# Altium PCB PCB1.PcbDoc
Units mil, origin at the board's own origin, x right, y up, seen from the top; angles counter-clockwise.
Board outline 2540 x 840 mil, 4 copper layers (Top Layer, Int1 (GND), Int2 (PWR), Bottom Layer), stack 61.811 mil thick; 28 components, 59 nets, 186 pads, 32 vias.
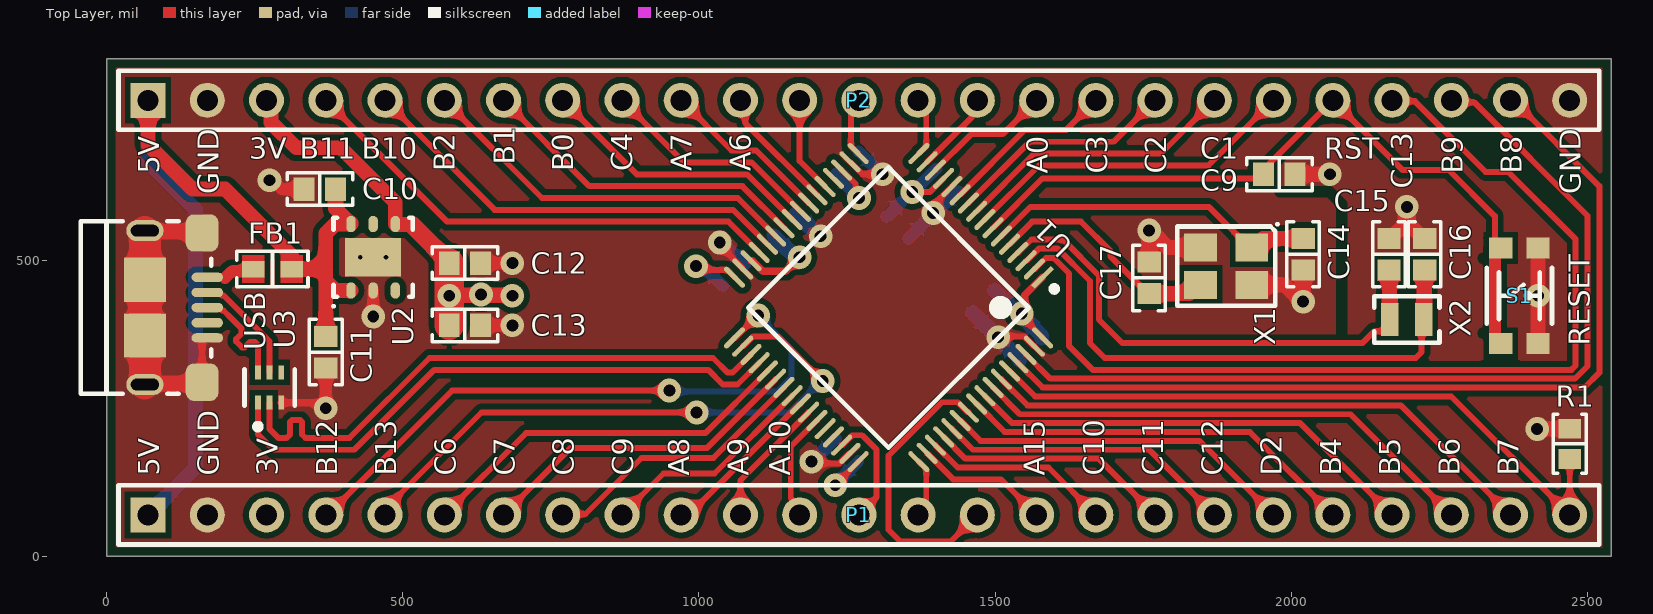
[diagram p0: Top Layer view]
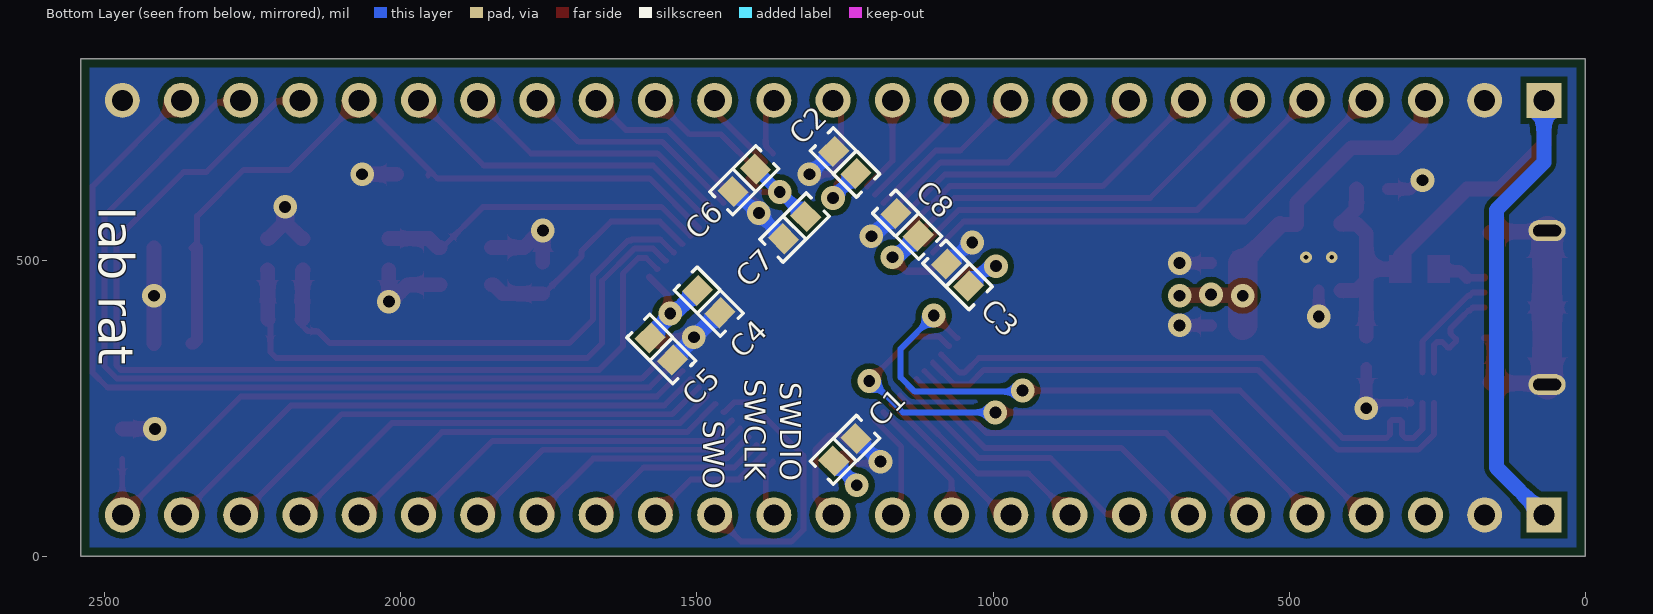
[diagram p1: Bottom Layer view, seen from below]
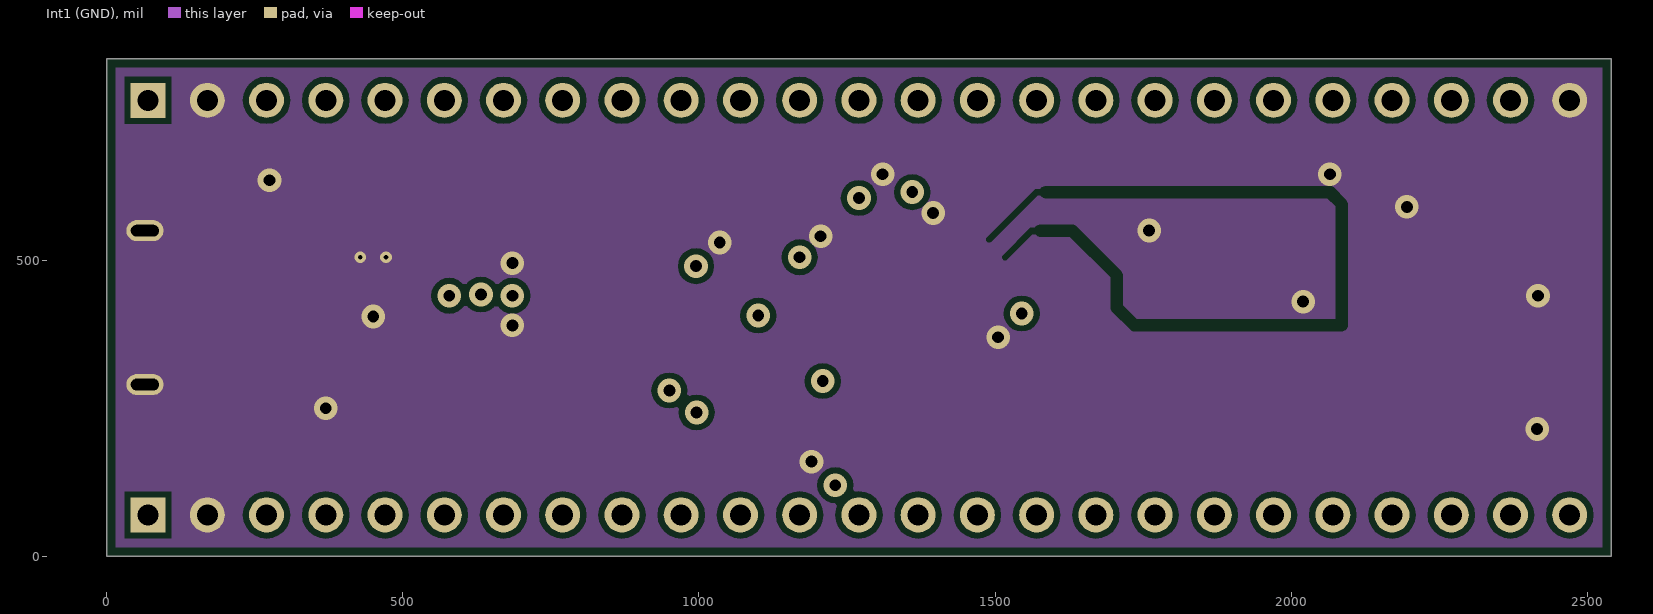
[diagram p2: Int1 (GND)]
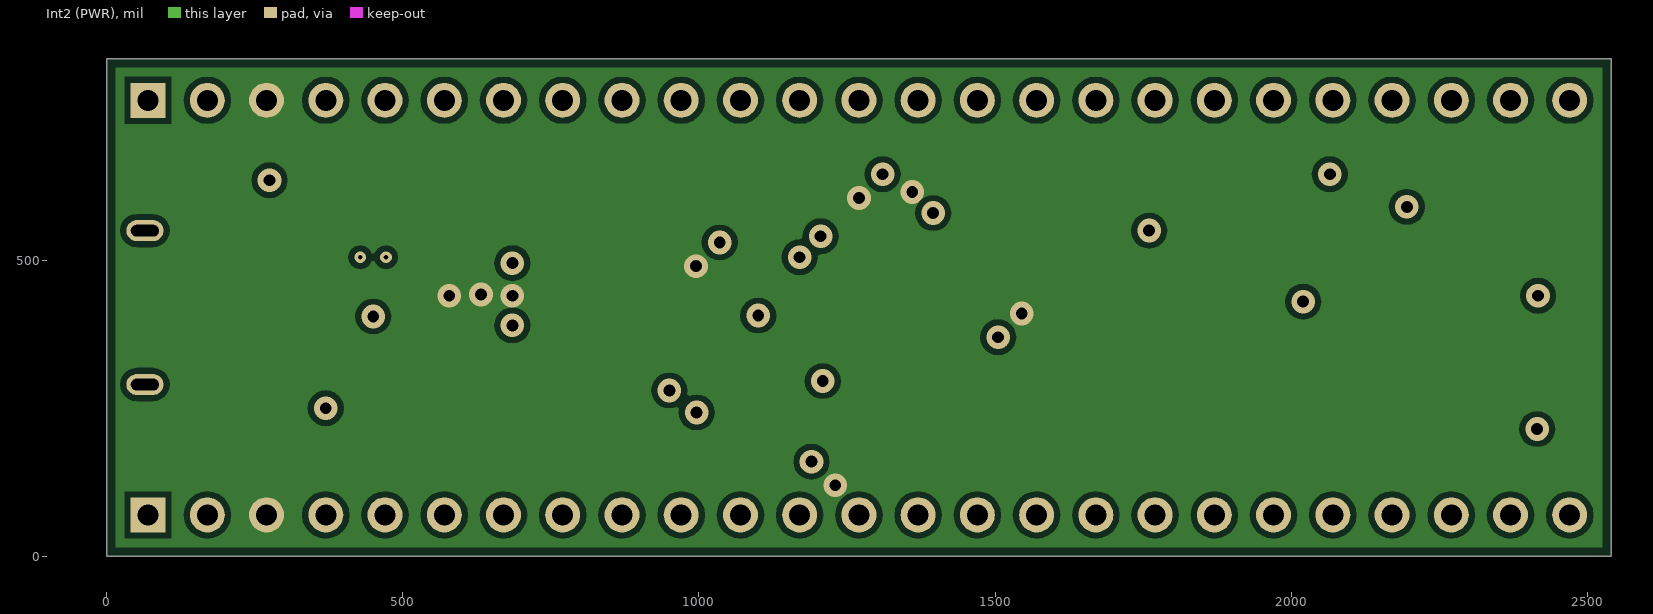
[diagram p3: Int2 (PWR)]
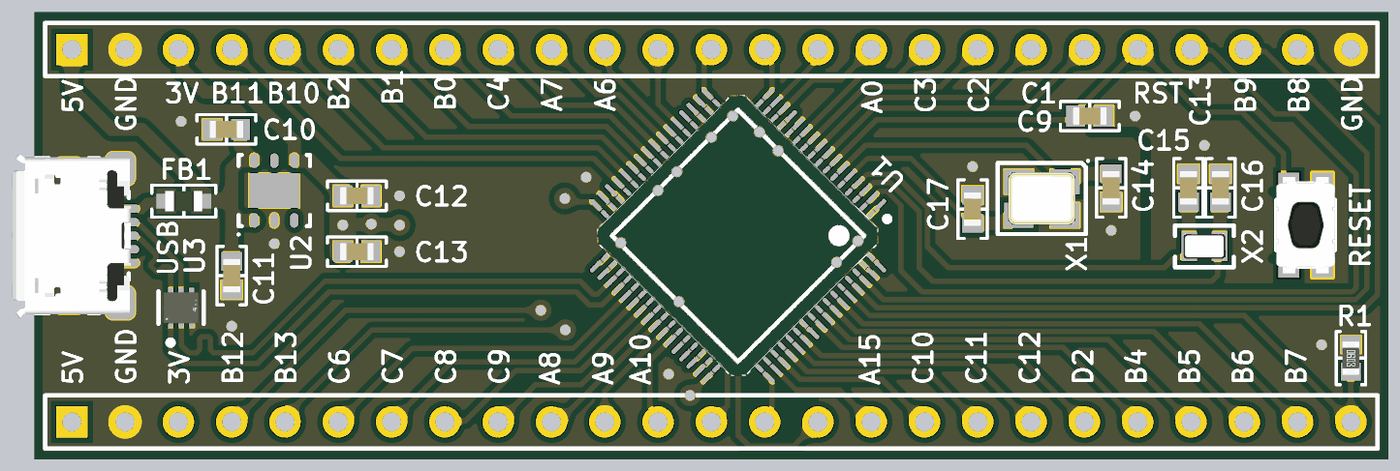
[diagram p4: 3D render of the assembled board from above, using the file's embedded part models]
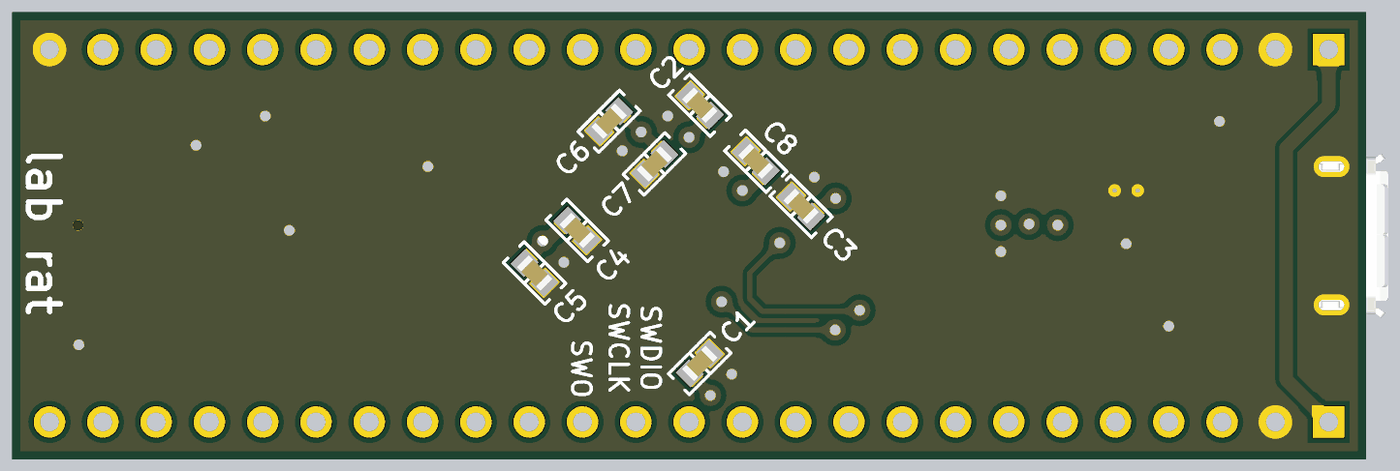
[diagram p5: 3D render of the assembled board from below, using the file's embedded part models]

## Layer stack, top to bottom
Top Solder: solder mask 1, SM-001, Dk 3.8
Top Layer: signal copper 1.378
Dielectric 2: prepreg 7.874, PP-017, Dk 4.6
Int1 (GND): signal copper 0.689
Dielectric 3: core 41.929, Core-039, Dk 4.8
Int2 (PWR): signal copper 0.689
Dielectric 4: prepreg 7.874, PP-017, Dk 4.6
Bottom Layer: signal copper 1.378
Bottom Solder: solder mask 1, SM-001, Dk 3.8

## Board outline
0,0 0,840 2540,840 2540,0

## Design rules (kind name [scope] priority, off if disabled: settings)
Clearance Clearance_1 [InNamedPolygon('GND_L01_P000')] p1: gap=10 ignorepadtopadclearanceinfootprint=FALSE except(0: Arc-Hole Track-Hole SMDPad-Hole THPad-Hole Via-Hole Fill-Hole Poly-Hole Region-Hole Text-Hole)
Clearance [All] p2: gap=10 ignorepadtopadclearanceinfootprint=FALSE except(0: Arc-Hole Track-Hole SMDPad-Hole THPad-Hole Via-Hole Fill-Hole Poly-Hole Region-Hole Text-Hole; 5: Arc-Arc Arc-Track Track-Track SMDPad-SMDPad; 7.87: Arc-SMDPad Arc-Fill Arc-Poly Arc-Region Track-SMDPad Track-Fill Track-Poly Track-Region SMDPad-Fill SMDPad-Poly SMDPad-Region)
DiffPairsRouting MC_USB_90DiffPairsRouting [InDifferentialPair ('MC_USB_90')] p1: maxlimit=20 minlimit=7 mostfreqgap=10 toplayer_minwidth=8 toplayer_maxwidth=12 toplayer_prefwidth=10 midlayer1_minwidth=8 midlayer1_maxwidth=12 midlayer1_prefwidth=10 midlayer2_minwidth=8 midlayer2_maxwidth=12 midlayer2_prefwidth=10 bottomlayer_minwidth=8 bottomlayer_maxwidth=12 bottomlayer_prefwidth=10 maxuncoupledlength=100
MatchedLengths MC_USB_90MatchedLengths [InDifferentialPair ('MC_USB_90')] p1: tolerance=100 checknetsindiffpair=TRUE checkdiffpairvsdiffpair=FALSE checkxsignals=FALSE checkothers=FALSE
MinimumSolderMaskSliver [All] p1: minsoldermaskwidth=8
PolygonConnect PolygonConnect_7 [All vs IsNamedPolygon('VDD_L03_P004')] p1: connectstyle=Direct reliefconductorwidth=10 reliefentries=4 polygonreliefangle="90 Angle" airgapwidth=10
PolygonConnect PolygonConnect_6 [All vs IsNamedPolygon('GND_L02_P003')] p2: connectstyle=Direct reliefconductorwidth=10 reliefentries=4 polygonreliefangle="90 Angle" airgapwidth=10
PolygonConnect PolygonConnect_5 [All vs IsNamedPolygon('GND_L01_P000')] p3: connectstyle=Direct reliefconductorwidth=10 reliefentries=4 polygonreliefangle="90 Angle" airgapwidth=10
PolygonConnect PolygonConnect_4 [All vs IsNamedPolygon('GND_L04_P002')] p4: connectstyle=Direct reliefconductorwidth=10 reliefentries=4 polygonreliefangle="90 Angle" airgapwidth=10
PolygonConnect PolygonConnect_3 [All vs IsNamedPolygon('GND_L01_P000')] p5: connectstyle=Direct reliefconductorwidth=10 reliefentries=4 polygonreliefangle="90 Angle" airgapwidth=10
PolygonConnect PolygonConnect_2 [All vs IsNamedPolygon('GND_L01_P000')] p6: connectstyle=Direct reliefconductorwidth=10 reliefentries=4 polygonreliefangle="90 Angle" airgapwidth=10
PolygonConnect PolygonConnect_1 [All vs IsNamedPolygon('GND_L01_P000')] p7: thpad.connectstyle=Direct thpad.reliefconductorwidth=10 thpad.reliefentries=4 thpad.polygonreliefangle="90 Angle" thpad.airgapwidth=10 smdpad.connectstyle=Direct smdpad.reliefconductorwidth=10 smdpad.reliefentries=4 smdpad.polygonreliefangle="90 Angle" smdpad.airgapwidth=10 via.connectstyle=Relief via.reliefconductorwidth=10 via.reliefentries=4 via.polygonreliefangle="90 Angle" via.airgapwidth=10
PolygonConnect [All] p8: connectstyle=Relief reliefconductorwidth=10 reliefentries=4 polygonreliefangle="90 Angle" airgapwidth=10
RoutingVias [All] p1: holewidth=28 width=50 viastyle="Through Hole" minholewidth=7.87 minwidth=17.72 maxholewidth=248.03 maxwidth=248.03
SilkToSilkClearance [All] p1: silktosilkclearance=5.91
SilkToSolderMaskClearance [IsPad] p1: minsilkscreentomaskgap=5.91 clearancetoexposedcopper=TRUE
SolderMaskExpansion [All] p1: expansion=1.97 istentingtop=FALSE
Width [All] p1: maxlimit=393.7 minlimit=3.54 preferedwidth=10
26 further rules are at their usual default settings.

## Components (designator, comment, footprint, x,y, rotation, side; value= is the part's Value field where it differs from the comment)
C1 "0.1µF" "CAP 0603_1608" 1250,180 r315 bottom locked
C2 "0.1µF" "CAP 0603_1608" 1250,665 r225 bottom locked
C3 "0.1µF" "CAP 0603_1608" 1060,475 r225 bottom locked
C4 "0.1µF" "CAP 0603_1608" 1480,430 r45 bottom locked
C5 "4.7µF" "CAP 0603_1608" 1560,350 r45 bottom locked
C6 "1µF" "CAP 0603_1608" 1420,635 r315 bottom locked
C7 "0.1µF" "CAP 0603_1608" 1335,555 r315 bottom locked
C8 "4.7µF" "CAP 0603_1608" 1145,560 r45 bottom locked
C9 "0.1µF" "CAP 0603_1608" 1980,645 r0 top locked
C10 "1µF" "CAP 0603_1608" 360,620 r0 top locked
C11 "0.1µF" "CAP 0603_1608" 370,345 r90 top locked
C12 "1µF" "CAP 0603_1608" 605,495 r180 top
C13 "0.1µF" "CAP 0603_1608" 605,390 r0 top
C14 "5pF" "CAP 0603_1608" 2020,510 r90 top locked
C15 "5pF" "CAP 0603_1608" 2165,510 r270 top locked
C16 "5pF" "CAP 0603_1608" 2225,510 r270 top locked
C17 "5pF" "CAP 0603_1608" 1760,470 r270 top locked
FB1 "BLM18PG121SN1D" MURA-BLM18PG_KG-B25-CHIP-2_V1 280,485 r0 top locked
P1 "Header 25" HDR1X25 70,70 r0 top locked
P2 "Header 25" HDR1X25 70,770 r0 top locked
R1 "10 kOhms" "RES 0603_1608" 2470,190 r270 top locked
S1 "KMR741NG ULC LFS" "C&K KMR7" 2385,440 r270 top
U1 "STM32F730R8T6" FP-LQFP64-5W-IPC_C 1320,420 r225 top locked
U2 "LD39050PU33R" DFN6D_L 450,505 r90 top locked
U3 "ECMF02-2AMX6" FP-QFN-6L-MFG 275,285 r90 top locked
USB "10118193-0001LF" "FCI USB 10118193-0001LF" 66.65,420 r90 top locked (schematic designator J1)
X1 "20MHz" "NDK NX3225SA" 1890,490 r180 top locked
X2 "32.768kHz" "ABRACON ABS06" 2195,400 r0 top locked

## Footprints (in the part's own frame and the unit in brackets; to place one, negate y for a bottom-side part, rotate by r counter-clockwise, add the part's x,y. Pads: shape width x height; smd on the part's side, far side on the other; paste and mask are expansions set on the pad)
"ABRACON ABS06" [mm] "Crystal, 2-Leads, Body 1.20x2.00mm, Pitch 1.50mm, IPC Medium Density"
  rect 0.75x1.4 smd: 1(-0.725,0) 2(0.725,0)
  silkscreen extent -1.4,-1 1.4,1, body extent -1.02,-0.62 1.03,0.63, height 0.6
"C&K KMR7" [mm] "T-Switch, 4-leads, body 4.2x2.8mm, C&K KMR741NG ULC LFS"
  rect 0.9x1 smd mask+0.1: 1(-2.05,0.8) 2(2.05,0.8) 3(-2.05,-0.8) 4(2.05,-0.8)
  silkscreen extent -1.2,-1.4 1.2,1.4, body extent -2.3,-1.4 2.3,1.4, height 2.5
"CAP 0603_1608" [mm] "Chip Capacitor, 2-Leads, Body 1.60x0.80mm, IPC Medium Density"
  rect 0.9x1 smd: 1(-0.675,0) 2(0.675,0)
  silkscreen extent -1.4,-0.7 1.4,0.7, body extent -0.8,-0.41 0.8,0.41, height 0.82
DFN6D_L [mm] "SON, 6-Leads, Body 3x3mm, Pitch 0.95mm, Thermal Pad 2.4x1.65mm, IPC High Density"
  oval 0.7x0.4 smd: 1(-1.425,0.95) 2(-1.425,0) 3(-1.425,-0.95) 4(1.425,-0.95) 5(1.425,0) 6(1.425,0.95)
  rect 1.65x2.4 smd: 7(0,0)
  silkscreen extent -2.15,-1.7 1.7,1.75, body extent -1.55,-1.55 1.55,1.55, height 0.95
"FCI USB 10118193-0001LF" [mm] "USB 2.0 Type B Micro"
  oval 0.4x1.35 smd: 1(1.3,-2.625) 2(0.65,-2.625) 3(0,-2.625) 4(-0.65,-2.625) 5(-1.3,-2.625)
  oval 0.9x1.6 hole 0.5 slot 1.2 at 90 deg: S(-3.3,0.05) S(3.3,0.05)
  rrect50% 1.6x1.4 smd: S(-3.2,-2.4) S(3.2,-2.4)
  rect 1.9x1.8 smd: S(-1.2,0.05) S(1.2,0.05)
  silkscreen extent -3.7,-2.8 3.7,2.8, body extent -3.93,-2.9 3.93,2.76, height 2.78
FP-LQFP64-5W-IPC_C [mm]
  rect 1.188x0.212 smd paste+0: 1(-5.591,3.75)
  rrect100% 1.188x0.212 smd paste+0: 2(-5.591,3.25) 3(-5.591,2.75) 4(-5.591,2.25) 5(-5.591,1.75) 6(-5.591,1.25) 7(-5.591,0.75) 8(-5.591,0.25) 9(-5.591,-0.25) 10(-5.591,-0.75) 11(-5.591,-1.25) 12(-5.591,-1.75) 13(-5.591,-2.25) 14(-5.591,-2.75) 15(-5.591,-3.25) 16(-5.591,-3.75) 33(5.591,-3.75) 34(5.591,-3.25) 35(5.591,-2.75) 36(5.591,-2.25) 37(5.591,-1.75) 38(5.591,-1.25) 39(5.591,-0.75) 40(5.591,-0.25) 41(5.591,0.25) 42(5.591,0.75) 43(5.591,1.25) 44(5.591,1.75) 45(5.591,2.25) 46(5.591,2.75) 47(5.591,3.25) 48(5.591,3.75)
  rrect100% 0.212x1.188 smd paste+0: 17(-3.75,-5.591) 18(-3.25,-5.591) 19(-2.75,-5.591) 20(-2.25,-5.591) 21(-1.75,-5.591) 22(-1.25,-5.591) 23(-0.75,-5.591) 24(-0.25,-5.591) 25(0.25,-5.591) 26(0.75,-5.591) 27(1.25,-5.591) 28(1.75,-5.591) 29(2.25,-5.591) 30(2.75,-5.591) 31(3.25,-5.591) 32(3.75,-5.591) 49(3.75,5.591) 50(3.25,5.591) 51(2.75,5.591) 52(2.25,5.591) 53(1.75,5.591) 54(1.25,5.591) 55(0.75,5.591) 56(0.25,5.591) 57(-0.25,5.591) 58(-0.75,5.591) 59(-1.25,5.591) 60(-1.75,5.591) 61(-2.25,5.591) 62(-2.75,5.591) 63(-3.25,5.591) 64(-3.75,5.591)
  silkscreen extent -5.72,-4.25 4.25,4.58, body extent -6.29,-6.29 6.29,6.29, height 0.25
FP-QFN-6L-MFG [mm]
  rect 0.6x0.25 smd paste+0: 1(-0.65,0.5) 2(-0.65,0) 3(-0.65,-0.5) 4(0.65,-0.5) 5(0.65,0) 6(0.65,0.5)
  silkscreen extent -1.8,-1.07 0.77,1.07, body extent -1.05,-0.97 1.05,0.97, height 0.25
HDR1X25 [mm] "Connector; Header; 25 Position"
  rect 1.5x1.5 hole 0.9: 1(0,0)
  round 1.5 hole 0.9: 2(2.54,0) 3(5.08,0) 4(7.62,0) 5(10.16,0) 6(12.7,0) 7(15.24,0) 8(17.78,0) 9(20.32,0) 10(22.86,0) 11(25.4,0) 12(27.94,0) 13(30.48,0) 14(33.02,0) 15(35.56,0) 16(38.1,0) 17(40.64,0) 18(43.18,0) 19(45.72,0) 20(48.26,0) 21(50.8,0) 22(53.34,0) 23(55.88,0) 24(58.42,0) 25(60.96,0)
  silkscreen extent -1.27,-1.27 62.23,1.27
MURA-BLM18PG_KG-B25-CHIP-2_V1 [mm] "Chip Ferrite Bead, 2-Leads, Body 1.6x0.8mm, Pitch 1.65mm, Flow Soldering, 18um Land Pad Thickness"
  rect 0.95x0.7 smd mask+0: 1(-0.825,0) 2(0.825,0)
  Top Layer region: 0.35,-0.6 1.3,-0.6 1.3,0.6 0.35,0.6
  Top Layer region: -1.3,-0.6 -0.35,-0.6 -0.35,0.6 -1.3,0.6
  body extent -0.87,-0.48 0.88,0.48, height 0.95
"NDK NX3225SA" [mm] "Crystal, 4-Leads, Body 2.50x3.20mm, Pitch 2.20mm, IPC Medium Density"
  rect 1.4x1.2 smd: 1(-1.1,-0.8) 2(1.1,-0.8) 3(1.1,0.8) 4(-1.1,0.8)
  silkscreen extent -2.25,-1.85 2.1,1.7, body extent -1.61,-1.26 1.61,1.26, height 0.6
"RES 0603_1608" [mm] "Chip Resistor, 2-Leads, Body 1.60x0.80mm, IPC Medium Density"
  rect 0.85x0.95 smd: 1(-0.65,0) 2(0.65,0)
  silkscreen extent -1.27,-0.7 1.27,0.7, body extent -0.8,-0.4 0.8,0.4, height 0.45

## Part data
C1 C2 C3 C4 C7 C9 C11 C13: library part 06033C104KAZ2A, "CAP CER 0.1UF 25V X7R 0603", Device Package="0603 (1608 Metric)", Manufacturer="AVX Corporation", Operating Temperature="-55°C ~ 125°C", Supplier Part Number 1=478-3539-1-ND, Temperature Coefficient=X7R, Tolerance=±10%, Voltage - Rated=25V, Applications="Boardflex Sensitive", Capacitance=0.1µF, ComponentLink1Description=Datasheet, ComponentLink1URL=http://datasheets.avx.com/FlexitermMLCC.pdf, ComponentLink2Description="DigiKey Link", ComponentLink2URL=http://digikey.com/product-detail/en/avx-corporation/06033C104KAZ2A/478-3539-1-ND/1024892, Features="Soft Termination", LastUpdated="9/2/2020 1:03:14 AM", Lifecycle Status=Active, Minimum Order=1, Mounting Type="Surface Mount, MLCC", Package / Case="0603 (1608 Metric)", Packaging=TapeAndReel, Part Number=06033C104KAZ2A, Part Status=Active, PartId=14079, Price=0.03, Series=FLEXITERM®, Size / Dimension="0.063\" L x 0.032\" W (1.60mm x 0.81mm)", Supplier 1=DigiKey, Thickness (Max)="0.035\" (0.90mm)"
C5 C8: library part GRM188C71C475KE21D, "CAP CER 4.7UF 16V X7S 0603", Device Package="0603 (1608 Metric)", Manufacturer="Murata Electronics", Operating Temperature="-55°C ~ 125°C", Supplier Part Number 1=490-16337-1-ND, Temperature Coefficient=X7S, Tolerance=±10%, Voltage - Rated=16V, Applications="General Purpose", Capacitance=4.7µF, ComponentLink1Description=Datasheet, ComponentLink1URL=https://search.murata.co.jp/Ceramy/image/img/A01X/G101/ENG/GRM188C71C475KE21-01.pdf, ComponentLink2Description="DigiKey Link", ComponentLink2URL=http://digikey.com/product-detail/en/murata-electronics/GRM188C71C475KE21D/490-16337-1-ND/7363319, LastUpdated="9/2/2020 1:03:25 AM", Lifecycle Status=Active, Minimum Order=1, Mounting Type="Surface Mount, MLCC", Package / Case="0603 (1608 Metric)", Packaging=TapeAndReel, Part Number=GRM188C71C475KE21D, Part Status=Active, PartId=8303, Price=0.08, Series=GRM, Size / Dimension="0.063\" L x 0.031\" W (1.60mm x 0.80mm)", Supplier 1=DigiKey, Thickness (Max)="0.035\" (0.90mm)"
C6 C10 C12: library part 06033C105KAT4A, "CAP CER 1UF 25V X7R 0603", Device Package="0603 (1608 Metric)", Manufacturer="AVX Corporation", Operating Temperature="-55°C ~ 125°C", Supplier Part Number 1=478-11508-1-ND, Temperature Coefficient=X7R, Tolerance=±10%, Voltage - Rated=25V, Applications="General Purpose", Capacitance=1µF, ComponentLink1Description=Datasheet, ComponentLink1URL=http://datasheets.avx.com/X7RDielectric.pdf, ComponentLink2Description="DigiKey Link", ComponentLink2URL=http://digikey.com/product-detail/en/avx-corporation/06033C105KAT4A/478-11508-1-ND/8107709, LastUpdated="9/2/2020 1:03:22 AM", Lifecycle Status=Active, Minimum Order=1, Mounting Type="Surface Mount, MLCC", Package / Case="0603 (1608 Metric)", Packaging=TapeAndReel, Part Number=06033C105KAT4A, Part Status=Active, PartId=10070, Price=0.06, Series=-, Size / Dimension="0.063\" L x 0.032\" W (1.60mm x 0.81mm)", Supplier 1=DigiKey, Thickness (Max)="0.037\" (0.94mm)"
C14 C15 C16 C17: library part CBR06C509A5GAC, "CAP CER 5PF 50V NP0 0603", Device Package="0603 (1608 Metric)", Manufacturer=KEMET, Operating Temperature="-55°C ~ 125°C", Supplier Part Number 1=399-17323-1-ND, Temperature Coefficient="C0G, NP0", Tolerance=±0.05pF, Voltage - Rated=50V, Applications="RF, Microwave, High Frequency", Capacitance=5pF, ComponentLink1Description=Datasheet, ComponentLink1URL=https://api.kemet.com/component-edge/download/datasheet/CBR06C509A5GAC.pdf, ComponentLink2Description="DigiKey Link", ComponentLink2URL=http://digikey.com/product-detail/en/kemet/CBR06C509A5GAC/399-17323-1-ND/8602597, Features="High Q, Low Loss, Ultra Low ESR", LastUpdated="9/2/2020 1:03:29 AM", Lifecycle Status=Active, Minimum Order=1, Mounting Type="Surface Mount, MLCC", Package / Case="0603 (1608 Metric)", Packaging=TapeAndReel, Part Number=CBR06C509A5GAC, Part Status=Active, PartId=6420, Price=0.09, Series="CBR-SMD RF C0G", Size / Dimension="0.063\" L x 0.031\" W (1.60mm x 0.80mm)", Supplier 1=DigiKey, Thickness (Max)="0.034\" (0.87mm)"
FB1: library part CMP-0686-00557-6, "Chip Ferrite Bead for Power Lines, 120 Ohm, 2000 mA, -55 to 125 degC, 1.6 x 0.8 x 0.95 mm SMD, Tape and Reel", DC Resistance="0.05 Ohm Max.", Manufacturer=Murata, Operating Temperature Range="-55 to 125 degC", Rated Current="2000 mA", ComponentLink1Description="Manufacturer URL", ComponentLink1URL=http://www.murata.com/, ComponentLink2Description=Datasheet, ComponentLink2URL=http://www.murata.com/products/catalog/pdf/c31e.pdf, ComponentLink3Description="Package Specification", ComponentLink3URL=http://www.murata.com/products/catalog/pdf/c31e.pdf, DatasheetVersion=08/2013, Impedance (at 100 MHz)="120 Ohm +/- 25%", Mounting Technology="Surface Mount", PackageDescription="2-Pin Chip, Body 1.6 x 0.8 mm", PackageReference=BLM18_H950-2, Packing="Tape and Reel", PartNumber=BLM18PG121SN1D
P1 P2: "Header, 25-Pin", LatestRevisionDate=17-Jul-2002, LatestRevisionNote="Re-released for DXP Platform.", Publisher="Altium Limited"
R1: library part ERJ-PA3F1002V, "RES SMD 10K OHM 1% 1/4W 0603", Device Package="0603 (1608 Metric)", Manufacturer="Panasonic Electronic Components", Operating Temperature="-55°C ~ 155°C", Power (Watts)="0.25W, 1/4W", Ratings=AEC-Q200, Supplier Device Package=0603, Supplier Part Number 1=P10KBYCT-ND, Temperature Coefficient=±100ppm/°C, Tolerance=±1%, ComponentLink1Description=Datasheet, ComponentLink1URL=https://industrial.panasonic.com/cdbs/www-data/pdf/RDO0000/AOA0000C331.pdf, ComponentLink2Description="DigiKey Link", ComponentLink2URL=http://digikey.com/product-detail/en/panasonic-electronic-components/ERJ-PA3F1002V/P10KBYCT-ND/5036115, Composition="Thick Film", Features="Automotive AEC-Q200, Pulse Withstanding", Height - Seated (Max)="0.022\" (0.55mm)", LastUpdated="9/2/2020 1:10:04 AM", Lifecycle Status=Active, Minimum Order=1, Number of Terminations=2, Package / Case="0603 (1608 Metric)", Packaging=TapeAndReel, Part Number=ERJ-PA3F1002V, Part Status=Active, PartId=14698, Price=0.02, Resistance="10 kOhms", Series=ERJ, Size / Dimension="0.063\" L x 0.031\" W (1.60mm x 0.80mm)", Supplier 1=DigiKey
S1: "SWITCH TACTILE SPST-NO 50MA 32V", Contact Rating @ Voltage="0.05A @ 32VDC", Manufacturer=C&K, Operating Force=400gf, Operating Temperature="-40°C ~ 85°C", Supplier Part Number 1=CKN10688CT-ND, Actuator Height off PCB, Vertical=2.50mm, Actuator Orientation="Top Actuated", Actuator Type=Standard, Circuit=SPST-NO, ComponentLink1Description=Datasheet, ComponentLink1URL=https://dznh3ojzb2azq.cloudfront.net/products/Tactile/KMR7/documents/datasheet.pdf, ComponentLink2Description="DigiKey Link", ComponentLink2URL=http://digikey.com/product-detail/en/c-k/KMR741NG-ULC-LFS/CKN10688CT-ND/6035360, Illumination=Non-Illuminated, Ingress Protection="IP67 - Dust Tight, Waterproof", LastUpdated="4/9/2020 10:01:05 AM", Lifecycle Status=Active, Minimum Order=1, Mounting Type="Surface Mount", Outline="4.20mm x 2.80mm", Packaging=TapeAndReel, Part Number="KMR741NG ULC LFS", Part Status=Active, Price=0.16, Series=KMR7, Supplier 1=DigiKey, Switch Function=Off-Mom, Termination Style="Gull Wing"
U1: "STMICROELECTRONICS - STM32F730R8T6 - ARM MCU, STM32 Family STM32F7 Series Microcontrollers, ARM Cortex-M7, 32bit, 216 MHz, 64 KB, 256 KB", Manufacturer=STMicroelectronics, Supplier Part Number 1=84AC2893, Category=Microcontrollers, ComponentLink1Description=http://www.farnell.com/datasheets/2710920.pdf?src-supplier=Farnell, ComponentLink1URL=http://www.farnell.com/datasheets/2710920.pdf?src-supplier=Farnell, ComponentLink2Description=https://www.st.com/resource/en/errata_sheet/dm00305994.pdf?src-supplier=Digi-Key, ComponentLink2URL=https://www.st.com/resource/en/errata_sheet/dm00305994.pdf?src-supplier=Digi-Key, Manufacturer Part Number=STM32F730R8T6, Pricing 1="1=4.30000, 10=3.73000, 25=3.59000, 50=3.44000, 100=3.30000, 250=3.15000, 500=2.87000 (USD)", RoHS=No, Stock 1=20, Supplier 1=Newark
U2: library part CMP-0244-00288-1, "500 mA Low Quiescent Current Low Noise Voltage Regulator, 3.3V, 6-Pin VDFDPN, Tape and Reel", ComponentLink1Description="Manufacturer URL", ComponentLink1URL=http://www.st.com, ComponentLink2Description=Datasheet, ComponentLink2URL=http://www.st.com/internet/com/TECHNICAL_RESOURCES/TECHNICAL_LITERATURE/DATASHEET/CD00227527.pdf, DatasheetVersion=1/03/2009, PackageDescription="6-Pin Plastic, Dual LLP, 3 x 3 mm Body, 0.95 mm Pitch, Exposed Pad", PackageReference=DFN6D, PackageVersion=2008
U3: library part CMP-12075-000001-1, "CMC 200MA 2LN SMD ESD", Manufacturer=STMicroelectronics, Max Junction Temp=+125°C, Package=QFN-6L, Series Resistance=2.5Ω, Temperature="-55°C to +125°C", Temperature Range Low=-55°C, Automotive=No, Category=Filter, ComponentLink2Description=Datasheet, ComponentLink2URL=https://www.st.com/resource/en/datasheet/ecmf02-2amx6.pdf, Device Class L1="Passive Components", Device Class L2="EMI / RFI Components", Device Class L3="Common Mode Chokes", Digikey Description="CMC 200MA 2LN SMD ESD", Height=0.55mm, Ipc Land Pattern Name=DFN170X150X50-6, Lead Free=Yes, Manufacturer Part Number=ECMF02-2AMX6, Mouser Description="TVS Diodes / ESD Suppressors ESD Mode Filter 6GHz USB 2.0 MIPI 8kV", Octopart=https://octopart.com/ecmf02-2amx6-stmicroelectronics-44353078, RoHS=TRUE, Standoff Height=0mm, Temperature Range High=+125°C
USB: "CONN RCPT USB2.0 MICRO B SMD R/A", Current Rating (Amps)="1.8A per Contact", Manufacturer="Amphenol ICC (FCI)", Operating Temperature="-30°C ~ 80°C", Supplier Part Number 1=609-4616-2-ND, Voltage - Rated=100VAC, ComponentLink1Description=Datasheet, ComponentLink1URL=https://cdn.amphenol-icc.com/media/wysiwyg/files/documentation/datasheet/inputoutput/io_usb_micro.pdf, ComponentLink2Description="DigiKey Link", ComponentLink2URL=//digikey.com/product-detail/en/amphenol-icc-fci/10118193-0001LF/609-4616-2-ND/2785388, Connector Type="USB - micro B", Features="Solder Retention", Gender=Receptacle, LastUpdated="12/9/2019 8:51:28 PM", Lifecycle Status=0, Mating Cycles=10000, Minimum Order=1, Mounting Feature=Horizontal, Mounting Type="Surface Mount, Right Angle; Through Hole", Number of Contacts=5, Number of Ports=1, Packaging=TapeAndReel, Part Number=10118193-0001LF, Part Status=Active, Price=0.21, Series=-, Shielding=Shielded, Specifications="USB 2.0", Supplier 1=DigiKey, Termination=Solder
X1: library part NX3225SA-20.000M-STD-CSR-1, "CRYSTAL 20.0000MHZ 8PF SMD", ESR (Equivalent Series Resistance)="50 Ohms", Frequency Stability=±15ppm, Load Capacitance=8pF, Manufacturer="NDK America, Inc.", Operating Mode=Fundamental, Operating Temperature="-10°C ~ 75°C", Package / Case="4-SMD, No Lead", Supplier Part Number 1=644-1050-1-ND, ComponentLink1Description=Datasheet, ComponentLink1URL=//media.digikey.com/pdf/Data%20Sheets/NDK%20PDFs/NX3225SA.pdf, ComponentLink2Description="DigiKey Link", ComponentLink2URL=http://digikey.com/product-detail/en/ndk-america-inc/NX3225SA-20.000M-STD-CSR-1/644-1050-1-ND/1128922, Frequency=20MHz, Frequency Tolerance=±15ppm, Height - Seated (Max)="0.024\" (0.60mm)", LastUpdated="9/2/2020 1:21:59 AM", Lifecycle Status=Active, Minimum Order=1, Mounting Type="Surface Mount", Packaging=TapeAndReel, Part Number=NX3225SA-20.000M-STD-CSR-1, Part Status=Active, PartId=604, Price=0.38, Series=NX3225SA, Size / Dimension="0.126\" L x 0.098\" W (3.20mm x 2.50mm)", Supplier 1=DigiKey, Type="MHz Crystal"
X2: library part ABS06-127-32.768KHZ-T, "IOT 32.786KHZ XTAL", ESR (Equivalent Series Resistance)="90 kOhms", Frequency Tolerance=±20ppm, Load Capacitance=12.5pF, Manufacturer="Abracon LLC", Operating Mode=Fundamental, Operating Temperature="-40°C ~ 85°C", Package / Case="2-SMD, No Lead", Supplier Part Number 1=535-14513-1-ND, ComponentLink1Description=Datasheet, ComponentLink1URL=https://abracon.com/datasheets/ABS06-127-32.768kHz-T.pdf, ComponentLink2Description="DigiKey Link", ComponentLink2URL=http://digikey.com/product-detail/en/abracon-llc/ABS06-127-32.768KHZ-T/535-14513-1-ND/8827204, Frequency=32.768kHz, Height - Seated (Max)="0.024\" (0.60mm)", LastUpdated="9/2/2020 1:21:46 AM", Lifecycle Status=Active, Minimum Order=1, Mounting Type="Surface Mount", Packaging=TapeAndReel, Part Number=ABS06-127-32.768KHZ-T, Part Status=Active, PartId=374, Price=0.36, Series=ABS06, Size / Dimension="0.079\" L x 0.047\" W (2.00mm x 1.20mm)", Supplier 1=DigiKey, Type="kHz Crystal (Tuning Fork)"

## Via types
v1: diameter 40, hole 20, Top Layer to Bottom Layer, 30 vias
v2: diameter 19.68, hole 7.87, Top Layer to Bottom Layer, 2 vias

## Nets (pads, with @x,y where several pads share a name; then routed paths per layer and width w, separated by ;. In a path a pad name is that pad's centre, name@x,y a point inside that pad or via, vN(x,y) a via of type N, cw(c..) or ccw(c..) an arc to the next point about the centre after c; other vN are vias at no path point)
5V_USB: C10.2 C11.2 FB1.2 P1.1 P2.1 U2.1 U2.6 | length 1584.8
  Top Layer w25: P2.1 70,695 145,620 200,620 312.48,507.52 FB1.2 370,485 ; C11.2 370,465 ; C10.2 386.57,587.13 408.82,564.88 410.47,564.88 412.6,562.76 U2.6 ; U2.6@412.09,561.61 U2.6 ; U2.1 386.1,448.9 370,465 ; 370,465 370,485 ; 370,485 370,545 386.1,561.1 U2.6
  Bottom Layer w25: P1.1 150,150 150,585 70,665 P2.1
BOOT0: P1.25 R1.2 U1.60 | length 1140.7
  Top Layer w10: U1.60 1567.44,270 2270,270 P1.25 R1.2
D+: U3.6 USB.3 | length 191.6
  Top Layer w10: USB.3 190.26,420 195.1,415.16 197.29,415.16 210.23,402.23 227.9,384.55 227.9,376.26 218.57,366.93 218.57,362.69 228.47,352.79 232.71,352.79 242.05,362.12 250.33,362.12 255.32,357.14 U3.6
D-: U3.5 USB.2 | length 191.6
  Top Layer w10: USB.2 190.26,445.59 195.1,440.75 197.29,440.75 275,363.04 U3.5
GND: C1.1 C2.1 C3.1 C4.1 C5.1 C6.2 C7.2 C8.2 C9.2 C10.1 C11.1 C12.1 C13.2 C14.1 C15.1 C16.1 C17.1 P1.2 P2.2 P2.25 R1.1 S1.1 S1.2 U1.12 U1.18 U1.31 U1.47 U1.63 U2.2 U2.7 U3.3 USB.5 USB.S X1.2 X1.4 | length 2402.9
  Top Layer w10: v1(1035,530) 1035,525.2 1073.87,486.33 U1.31 ; v1(1190,160) 1192.85,157.15 1236.95,157.15 1253.67,173.87 U1.47 ; U1.18 1275.95,645 v1(1310,645) ; v1(1395.36,579.64) 1401.1,585.38 1401.1,598.53 U1.12 ; v1(1505,370) 1506.54,371.54 1548.25,371.54 1564.97,354.82 U1.63
  Top Layer w12: USB.S@161.14,294.02 161.14,367.09 162.87,368.82 USB.5 ; U3.3 353.01,259.41 362.42,250 v1(370,250)
  Top Layer w20: v1(275,635) 280.41,635 295.41,620 C10.1 ; v1(370,250) C11.1 ; v1(450,405) U2.2 ; C13.2 v1(685,390) ; C12.1 v1(685,495)
  Top Layer w25: USB.S@64.68,290.08 66.65,292.05 159.17,292.05 USB.S@161.14,294.02 ; USB.S@64.68,549.92 66.65,547.95 159.17,547.95 USB.S@161.14,545.98 ; C17.1 v1(1760,550) 1763.1,550 1791.6,521.5 X1.2 ; X1.4 1988.4,458.5 2016.9,430 v1(2020,430) C14.1 ; C9.2 v1(2065,645) ; C15.1 2166.97,536.57 2192.13,561.74 2192.13,583.07 2196.19,587.13 v1@2197.87,587.13 ; v1(2195,590) v1@2197.87,587.13 ; C16.1 2223.03,536.57 2197.87,561.74 v1@2197.87,587.13 ; v1(2415,215) 2415.3,215.3 2469.7,215.3 R1.1 ; S1.2 S1.1
  Top Layer w50: USB.S@64.68,290.08 64.68,372.76 64.68,467.24 USB.S@64.68,549.92
  Bottom Layer w20: v1(1035,530) 1038.79,530 1075,493.79 C3.1 ; v1(1190,160) 1191.21,160 1230,198.79 C1.1 ; C2.1 1270,683.79 1308.79,645 v1(1310,645) ; C7.2 1353.79,537.14 1395.36,578.71 v1(1395.36,579.64) 1398.79,579.64 1435.36,616.21 C6.2
  Bottom Layer w25: C8.2 1165.36,578.79 1203.79,540.36 v1(1205.36,540.36) ; C4.1 1462.5,411.21 1503.71,370 v1(1505,370) 1505,368.71 1541.21,332.5 C5.1
  other v1: 2416.5,440
  other v2: 428.35,505 471.65,505
NetC8_1: C8.1 U1.30 | length 158.1
  Top Layer w12: U1.30 1090.09,499.1 1107.81,481.38 1146.38,481.38 v1(1170,505)
  Bottom Layer w25: C8.1 1159.55,507.87 1167.13,507.87 v1(1170,505)
NetFB1_1: FB1.1 USB.1 | length 84.2
  Top Layer w12: USB.1 170.72,470.46 199.54,470.46 200,470
  Top Layer w20: 200,470 211.22,481.22 243.74,481.22 FB1.1
OSC32_IN: C16.2 U1.3 X2.2 | length 959.2
  Top Layer w10: U1.3 1553.37,499.1 1574.27,520 1605,520 1660,465 1660,360 1685,335 2210,335 2220,345 2220,396.46 X2.2
  Top Layer w25: X2.2 2224.27,400.73 2224.27,482.7 C16.2
OSC32_OUT: C15.2 U1.4 X2.1 | length 859.8
  Top Layer w10: U1.4 1539.45,513.02 1561.43,535 1610,535 1611.46,533.54 1615.61,533.54 1675,474.15 1675,400 1715,360 2120,360 2140,380 2156.69,380 2166.46,389.76 X2.1
  Top Layer w25: C15.2 2165.73,482.7 2165.73,400.73 X2.1
OSC_IN: C17.2 U1.5 X1.3 | length 400
  Top Layer w10: U1.5 1562.44,565 1645,565 1695,515 1695,505.97 1734.98,465.98 1735.47,465.98 1758.03,443.43 C17.2
  Top Layer w25: C17.2 1827.68,443.43 1842.76,458.5 X1.3
OSC_OUT: C14.2 U1.6 X1.1 | length 564.5
  Top Layer w10: U1.6 1559.6,590 1860.87,590 1929.37,521.5 X1.1
  Top Layer w25: X1.1 1937.24,521.5 1952.32,536.57 C14.2
PA0-WKUP: P2.16 U1.14 | length 219.7
  Top Layer w10: U1.14 1459.51,712.63 1512.63,712.63 P2.16
PA1: P2.15 U1.15 | length 139
  Top Layer w10: U1.15 1460.61,741.57 1460.61,760.61 P2.15
PA2: P2.14 U1.16 | length 100.8
  Top Layer w10: P2.14 1370,756.73 1383.68,743.04 1383.68,692.48 U1.16
PA3: P2.13 U1.17 | length 100.8
  Top Layer w10: U1.17 1256.32,692.48 1256.32,743.04 1270,756.73 P2.13
PA4: U1.20
PA5: P2.12 U1.21 | length 163.5
  Top Layer w10: P2.12 1170,667.44 U1.21
PA6: P2.11 U1.22 | length 213
  Top Layer w10: P2.11 1078.12,761.88 1078.12,731.47 U1.22
PA7: P2.10 U1.23 | length 287.1
  Top Layer w10: P2.10 1054.92,685.08 1096.68,685.08 U1.23
PA8: P1.10 U1.41 | length 278.9
  Top Layer w10: P1.10 982.76,70 1170.15,257.39 U1.41
PA9: P1.11 U1.42 | length 221.2
  Top Layer w10: P1.11 1070,128.24 U1.42
PA10: P1.12 U1.43 | length 184
  Top Layer w10: P1.12 1170,83.27 1155,98.27 1155,185.4 U1.43
PA11: U1.44
PA12: U1.45
PA15: P1.16 U1.50 | length 227.8
  Top Layer w10: U1.50 1429.05,130 1510,130 P1.16
PB0: P2.8 U1.25 | length 470.8
  Top Layer w10: P2.8 895,645 1081.08,645 U1.25
PB1: P2.7 U1.26 | length 562.6
  Top Layer w10: P2.7 815,625 1073.24,625 U1.26
PB2: P2.6 U1.27 | length 654.5
  Top Layer w10: P2.6 735,605 1065.4,605 U1.27
PB4: P1.21 U1.56 | length 678.9
  Top Layer w10: U1.56 1516.08,210 1930,210 P1.21
PB5: P1.22 U1.57 | length 770.8
  Top Layer w10: U1.57 1528.92,225 2015,225 P1.22
PB6: P1.23 U1.58 | length 862.6
  Top Layer w10: U1.58 1541.76,240 2100,240 P1.23
PB7: P1.24 U1.59 | length 954.5
  Top Layer w10: U1.59 1554.6,255 2185,255 P1.24
PB8: P2.24 U1.61 | length 1534.5
  Top Layer w10: U1.61 1580.27,285 2495,285 2520,310 2520,625 2375,770 P2.24
PB9: P2.23 U1.62 | length 1538.2
  Top Layer w10: U1.62 1593.11,300 2478.95,300 2500,321.05 2500,575 2308.53,766.47 2273.53,766.47 P2.23
PB10: P2.5 U1.28 | length 746.3
  Top Layer w10: P2.5 655,585 1057.56,585 U1.28
PB11: P2.4 U1.29 | length 838.2
  Top Layer w10: P2.4 575,565 1049.73,565 U1.29
PB12: P1.4 U1.33 | length 1067.2
  Top Layer w10: P1.4 373.28,70 583.28,280 v1(950,280) ; U1.33 1061.08,368.74 1098.88,406.54 v1(1100,406.54)
  Bottom Layer w10: v1(950,280) 952,278 1132,278 1156,302 1156,350.54 v1(1100,406.54)
PB13: P1.5 U1.34 | length 1011.8
  Top Layer w10: P1.5 470,80 633,243 v1(996,243) ; U1.34 1075.03,354.82 1091.75,371.54 1133.46,371.54 v1(1209,296)
  Bottom Layer w10: v1(996,243) 1152,243 1205,296 v1(1209,296)
PC0: P2.20 U1.8 | length 570.8
  Top Layer w10: U1.8 1573.92,660 1860,660 P2.20
PC1: P2.19 U1.9 | length 478.9
  Top Layer w10: U1.9 1566.08,680 1780,680 P2.19
PC2: P2.18 U1.10 | length 387.1
  Top Layer w10: U1.10 1558.24,700 1700,700 P2.18
PC3: P2.17 U1.11 | length 295.2
  Top Layer w10: U1.11 1550.4,720 1620,720 P2.17
PC4: P2.9 U1.24 | length 378.9
  Top Layer w10: P2.9 975,665 1088.92,665 U1.24
PC6: P1.6 U1.37 | length 646.3
  Top Layer w10: P1.6 708,208 1010.56,208 U1.37
PC7: P1.7 U1.38 | length 554.5
  Top Layer w10: P1.7 782.76,182.76 1013.17,182.76 U1.38
PC8: P1.8 U1.39 | length 462.6
  Top Layer w10: P1.8 771.5,71.5 808.53,71.5 903.03,166 1024.24,166 U1.39
PC9: P1.9 U1.40 | length 370.8
  Top Layer w10: P1.9 940,140 1026.08,140 U1.40
PC10: P1.17 U1.51 | length 319.7
  Top Layer w10: U1.51 1436.89,150 1590,150 P1.17
PC11: P1.18 U1.52 | length 411.5
  Top Layer w10: U1.52 1449.73,165 1675,165 P1.18
PC12: P1.19 U1.53 | length 503.4
  Top Layer w10: U1.53 1462.56,180 1760,180 P1.19
PC13: P2.22 U1.2 | length 1694.8
  Top Layer w10: U1.2 1567.29,485.18 1585.74,503.63 1598.96,503.63 1625,477.59 1625,355 1665,315 2472.74,315 2480,322.26 2480,535.37 2366.47,648.91 2328.12,648.91 2208.53,768.5 2171.5,768.5 P2.22
PD2: P1.20 U1.54 | length 595.2
  Top Layer w10: U1.54 1475.4,195 1845,195 P1.20
RST: C9.1 P2.21 S1.3 S1.4 U1.7 | length 1244.9
  Top Layer w10: U1.7 1579.62,637.86 1937.86,637.86 1950.2,650.2 P2.21 2187.51,652.49 2265.38,652.49 2343.5,574.37 2343.5,530.71 S1.3 ; C9.1@1953.43,643.03 C9.1
  Top Layer w20: S1.3@2343.5,520.71 2343.82,520.39 2343.82,364.78 2349.3,359.29 S1.4
SYS_JTCK-SWCLK: P1.14 U1.49 | length 100.8
  Top Layer w10: P1.14 1370,83.27 1383.68,96.96 1383.68,147.52 U1.49
SYS_JTDO-SWO: P1.15 U1.55 | length 481
  Top Layer w10: U1.55 1453.62,243.47 1436.9,260.19 1410.19,260.19 1320,170 1320,45 1340,25 1425,25 P1.15
SYS_JTMS-SWDIO: P1.13 U1.46 | length 198.6
  Top Layer w10: U1.46 1242.06,187.79 1258.78,204.51 1275.47,204.51 1300,179.98 1300,100 P1.13
USB_OTG_HS_DM: U1.35 U3.2 | length 992
  Top Layer w10: U3.2 275.32,259.09 275.32,214.68 290,200 299,200 304,200 309.86,205.86 309.86,227.04 312.86,230.04 326.86,230.04 329.86,227.04 329.86,205.86 335.72,200 348,200 410,200 545,335 1023.69,335 1048.42,310.26 1056.71,310.26 1087.34,340.9 U1.35
USB_OTG_HS_DP: U1.36 U3.1 | length 991.7
  Top Layer w10: U3.1 255.32,206.4 281.72,180 418.28,180 553.28,315 1015.4,315 1040.14,290.26 1064.99,290.26 U1.36
VDD: C1.2 C2.2 C3.2 C4.2 C5.2 C6.1 C7.1 C12.2 C13.1 P1.3 P2.3 U1.1 U1.13 U1.19 U1.32 U1.48 U1.64 U2.4 | length 1475.6
  Top Layer w10: v1(995,490) 1003.12,490 1009.43,483.68 1047.52,483.68 U1.32 ; v1(1230,120) 1230,120.6 1268.74,159.35 U1.48 ; U1.19 1264.26,628.85 1264.26,610.74 v1(1270,605) ; v1(1360,615) 1389.73,615 U1.13 ; v1(1545,410) 1545,404.95 1580.05,369.9 U1.64
  Top Layer w12: v1(1545,410) 1549.59,414.59 1549.59,440.8 U1.1
  Top Layer w20: P2.3 P2.3@277.47,762.53
  Top Layer w25: P2.3@277.47,762.53 277.47,732.53 320,690 395,690 487.4,597.6 U2.4 488.68,559.82 515.57,559.82 ; C12.2@573.21,500.22 C12.2 C12.2@578.43,496.97 ; v1(578.43,440) 579.43,441 631,441 v1(632,442) 633,441 684,441 v1(685,440)
  Top Layer w30: 515.57,559.82 C12.2@578.43,496.97
  Top Layer w50: C13.1 v1(578.43,440) C12.2
  Bottom Layer w20: v1(995,490) 998.83,486.17 1011.24,486.17 C3.2 ; v1(1230,120) 1230,121.21 1268.79,160 C1.2 ; C2.2 1231.21,645 1270,606.21 v1(1270,605) ; C7.1 1317.5,573.79 1358.71,615 v1(1360,615) 1361.21,615 1400,653.79 C6.1
  Bottom Layer w25: C4.2 1534.71,412.87 1542.13,412.87 v1(1545,410) 1545,406.29 1578.79,372.5 C5.2
pads on no net: U2.3 U2.5 U3.4 USB.4

## Polygon pours and split planes (outlines as drawn)
VDD on Int2 (PWR) "VDD_L03_P004" (solid, pour order 4): 15,825 15,15 2525,15 2525,825
GND on Int1 (GND) "GND_L02_P003" (solid, pour order 3): 15,825 15,15 2525,15 2525,825
GND on Bottom Layer "GND_L04_P002" (solid, pour order 2): 15,825 15,15 2525,15 2525,825
GND on Top Layer "GND_L01_P000" (solid, remove dead copper, pour order 0): 15,825 15,15 2525,15 2525,825

## Other copper
Top Layer:
  pour cut-out: 1981.14,605.3 cw(c1981.14,615.32) 1981.14,625.33 2064.68,625.33 cw(c2064.68,615.32) 2071.77,622.4 2092.08,602.08 cw(c2085,595) 2095.01,595 2095.01,375 cw(c2085,375) 2074.99,375 2074.99,590.85 2060.54,605.3
Int1 (GND):
  pour cut-out: 1486.45,538.55 ccw(c1490,535) 1493.55,531.45 1572.08,609.98 1576.33,609.98 ccw(c1585,615) 1585,604.98 2060.85,604.98 2074.99,590.85 2074.99,400.02 1739.15,400.02 1715.01,424.15 1715.01,475 ccw(c1705,475) 1712.08,482.08 1637.08,557.08 ccw(c1630,550) 1630,560.02 1576,560.02 ccw(c1576,550) 1567.33,555.02 1562,555.02 ccw(c1562,550) 1558.44,553.53 1558.45,553.55 1513.45,508.55 ccw(c1517,505) 1520.55,501.45 1564.08,544.98 1567.33,544.98 ccw(c1576,550) 1576,539.98 1625.85,539.98 1694.99,470.85 1694.99,420 ccw(c1705,420) 1697.92,412.92 1727.92,382.92 ccw(c1735,390) 1735,379.98 2085,379.98 ccw(c2085,390) 2095.01,390 2095.01,595 ccw(c2085,595) 2092.08,602.08 2072.08,622.08 ccw(c2065,615) 2065,625.02 1585,625.02 ccw(c1585,615) 1576.33,620.02 1570,620.02 ccw(c1570,615) 1566.44,618.53 1566.45,618.55

## Silkscreen, mask and mechanical layers (free items; w line width, h text height)
Top Overlay:
  lines w6: 220,470 220,455 340,455 340,470 ; 220,500 220,515 340,515 340,500 ; 280,455 280,515
  text "3V" at 241,671 h35
  text "B11" at 326,671 h35
  text "B10" at 431,671 h35
  text "C1" at 1846,671 h35
  text "RST" at 2056,671 h35
  text "B1" at 689,661 h35 r90
  text "B2" at 587.76,650.13 h35 r90
  text "B0" at 787.76,650.13 h35 r90
  text "C4" at 887.76,650.13 h35 r90
  text "A7" at 987.76,650.13 h35 r90
  text "A6" at 1087.76,650.13 h35 r90
  text "5V" at 89,646 h35 r90
  text "A0" at 1589,646 h35 r90
  text "C3" at 1689,646 h35 r90
  text "C2" at 1789,646 h35 r90
  text "B9" at 2289,646 h35 r90
  text "B8" at 2389,646 h35 r90
  text "C13" at 2204,621 h35 r90
  text "GND" at 189,611 h35 r90
  text "GND" at 2489,611 h35 r90
  text "RESET" at 2504,356 h35 r90
  text "5V" at 89,136 h35 r90
  text "GND" at 189,136 h35 r90
  text "3V" at 289,136 h35 r90
  text "B12" at 389,136 h35 r90
  text "B13" at 489,136 h35 r90
  text "C6" at 589,136 h35 r90
  text "C7" at 689,136 h35 r90
  text "C8" at 789,136 h35 r90
  text "C9" at 889,136 h35 r90
  text "A8" at 984,136 h35 r90
  text "A9" at 1084,136 h35 r90
  text "A10" at 1154,136 h35 r90
  text "A15" at 1584,136 h35 r90
  text "C10" at 1684,136 h35 r90
  text "C11" at 1784,136 h35 r90
  text "C12" at 1884,136 h35 r90
  text "D2" at 1984,136 h35 r90
  text "B4" at 2084,136 h35 r90
  text "B5" at 2184,136 h35 r90
  text "B6" at 2284,136 h35 r90
  text "B7" at 2384,136 h35 r90
Bottom Overlay:
  text "lab rat" at 2510,590 h60 r90
  text "SWCLK" at 1419,299 h35 r90
  text "SWDIO" at 1359,294 h35 r90
  text "SWO" at 1489,229 h35 r90
Mechanical 1:
  the board outline again, w5.91